# Altium PCB UZ_D_Voltage_3V3_5V.PcbDoc (part 1 of 2)
Units mm, origin at the board's own origin, x right, y up, seen from the top; angles counter-clockwise.
Board outline 155.98 x 100 mm, 2 copper layers (Top Layer, Bottom Layer), stack 0.68 mm thick; 108 components, 127 nets, 481 pads, 154 vias.
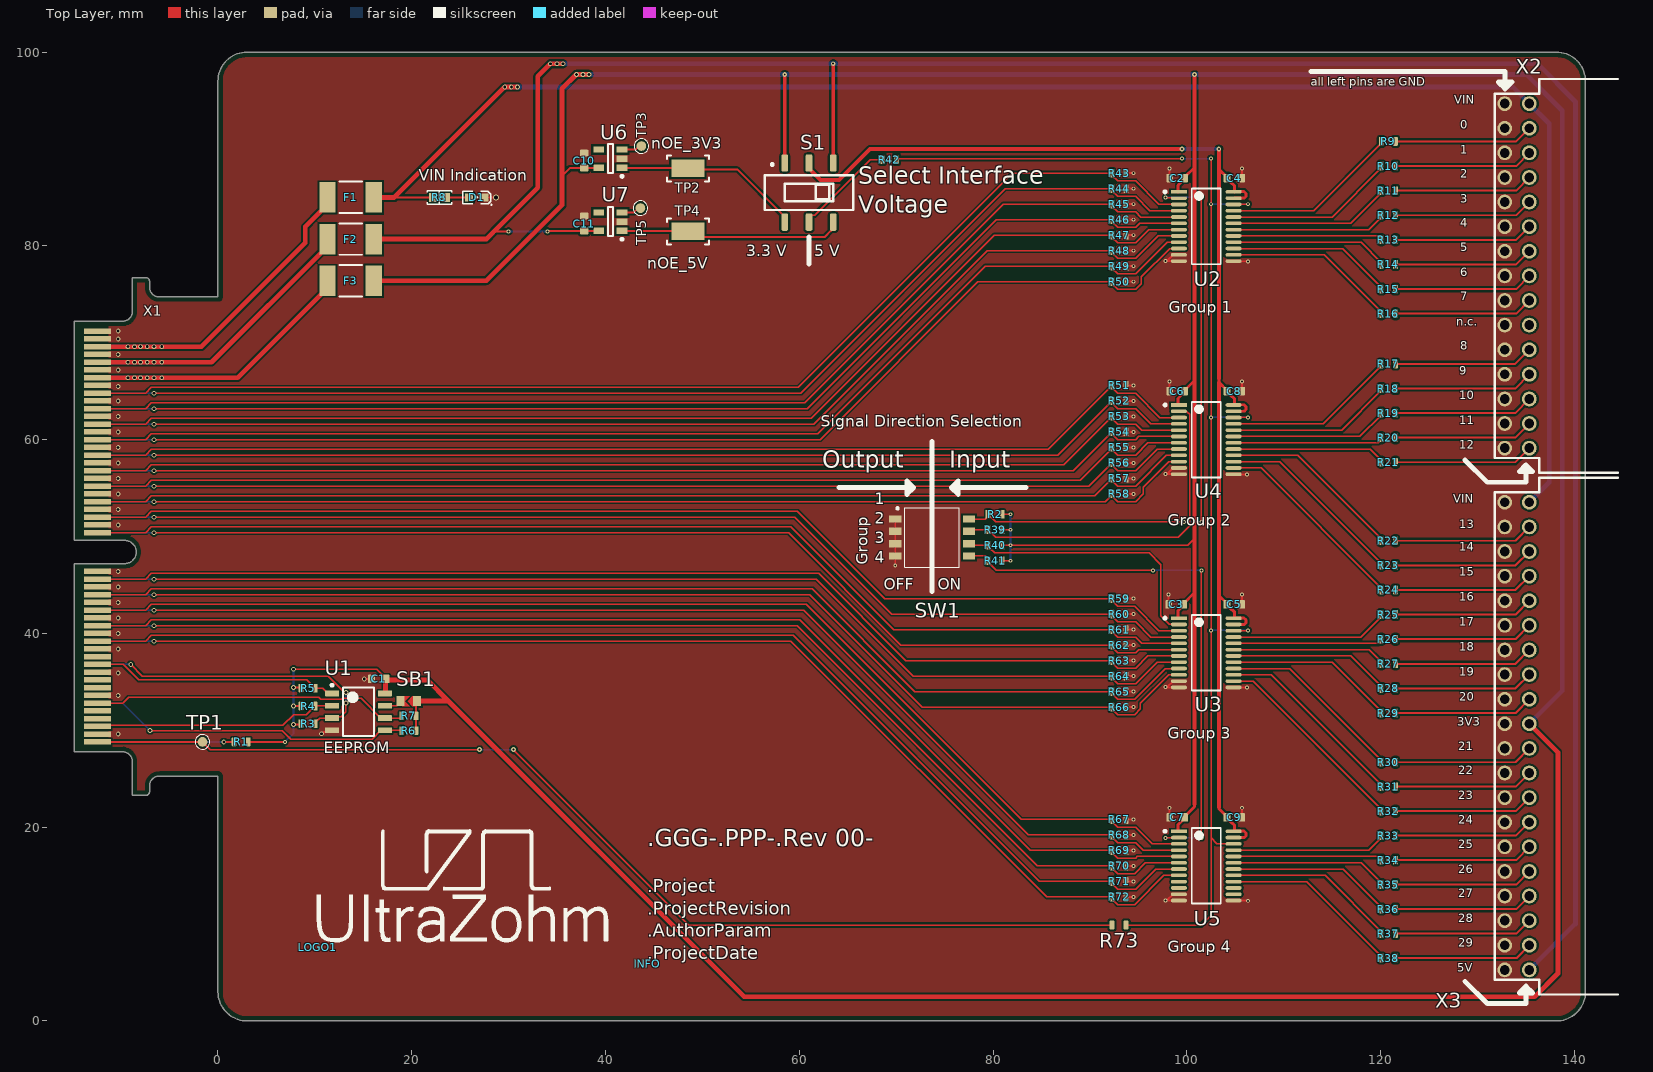
[diagram p0: Top Layer view]
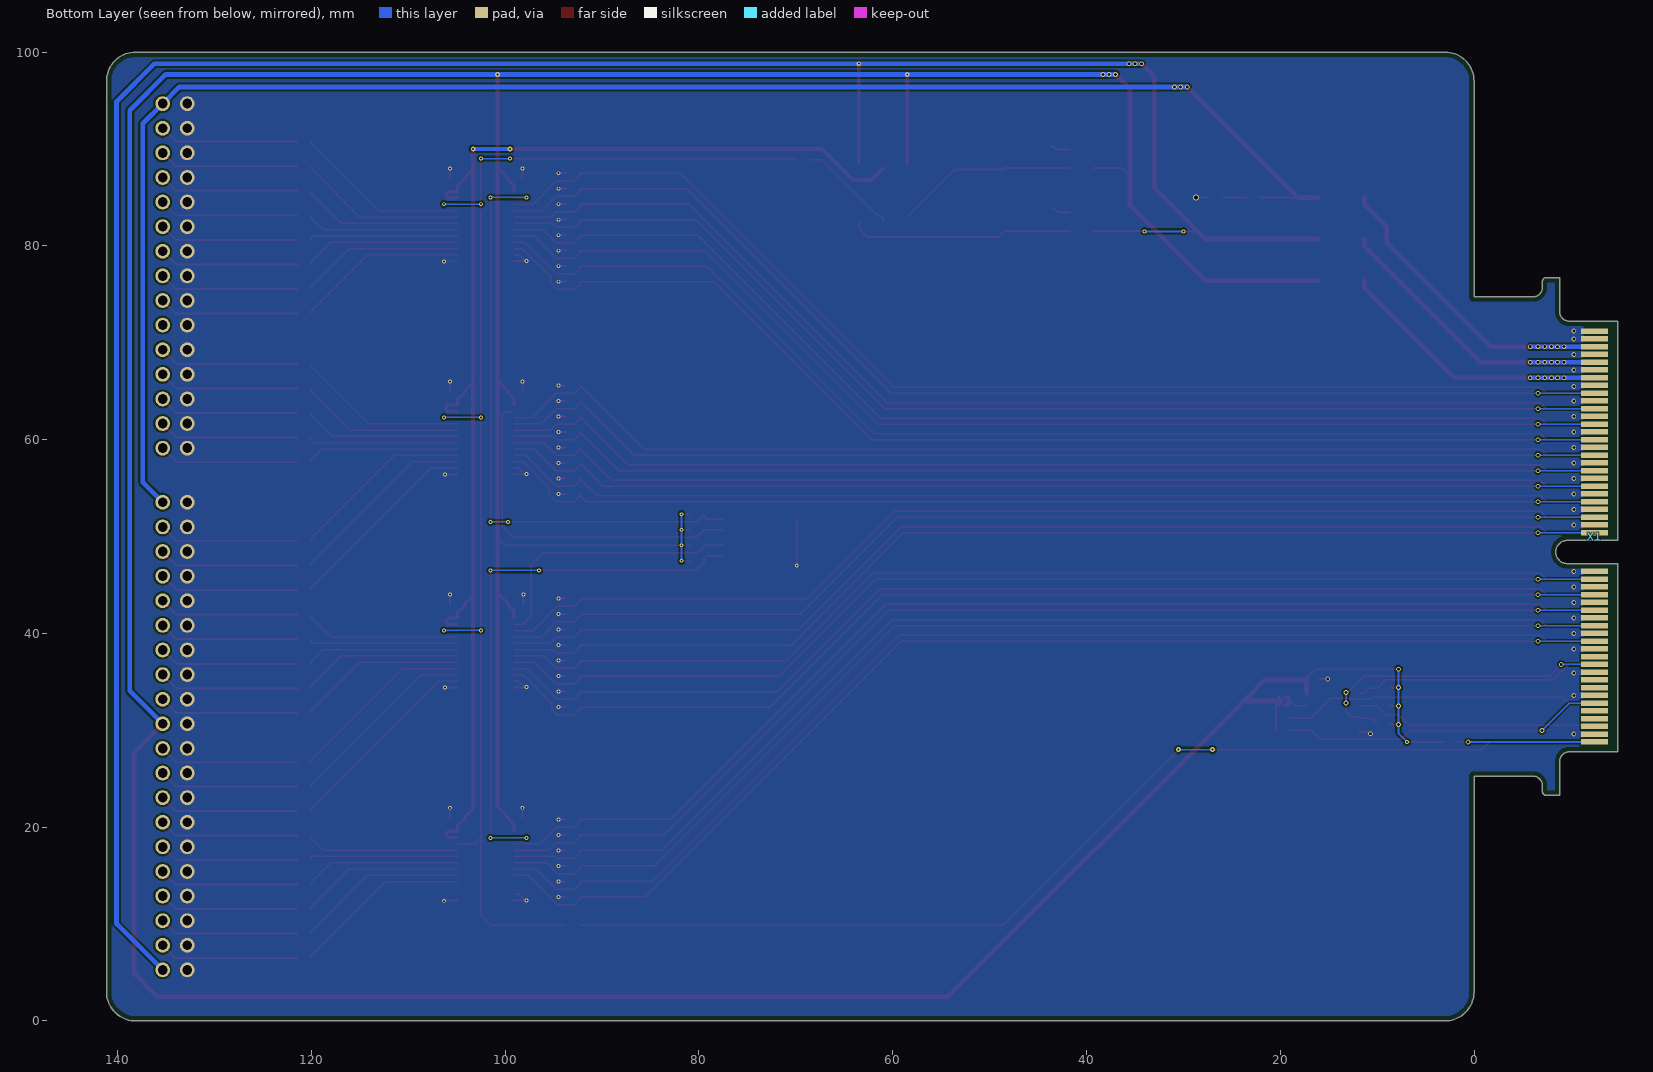
[diagram p1: Bottom Layer view, seen from below]
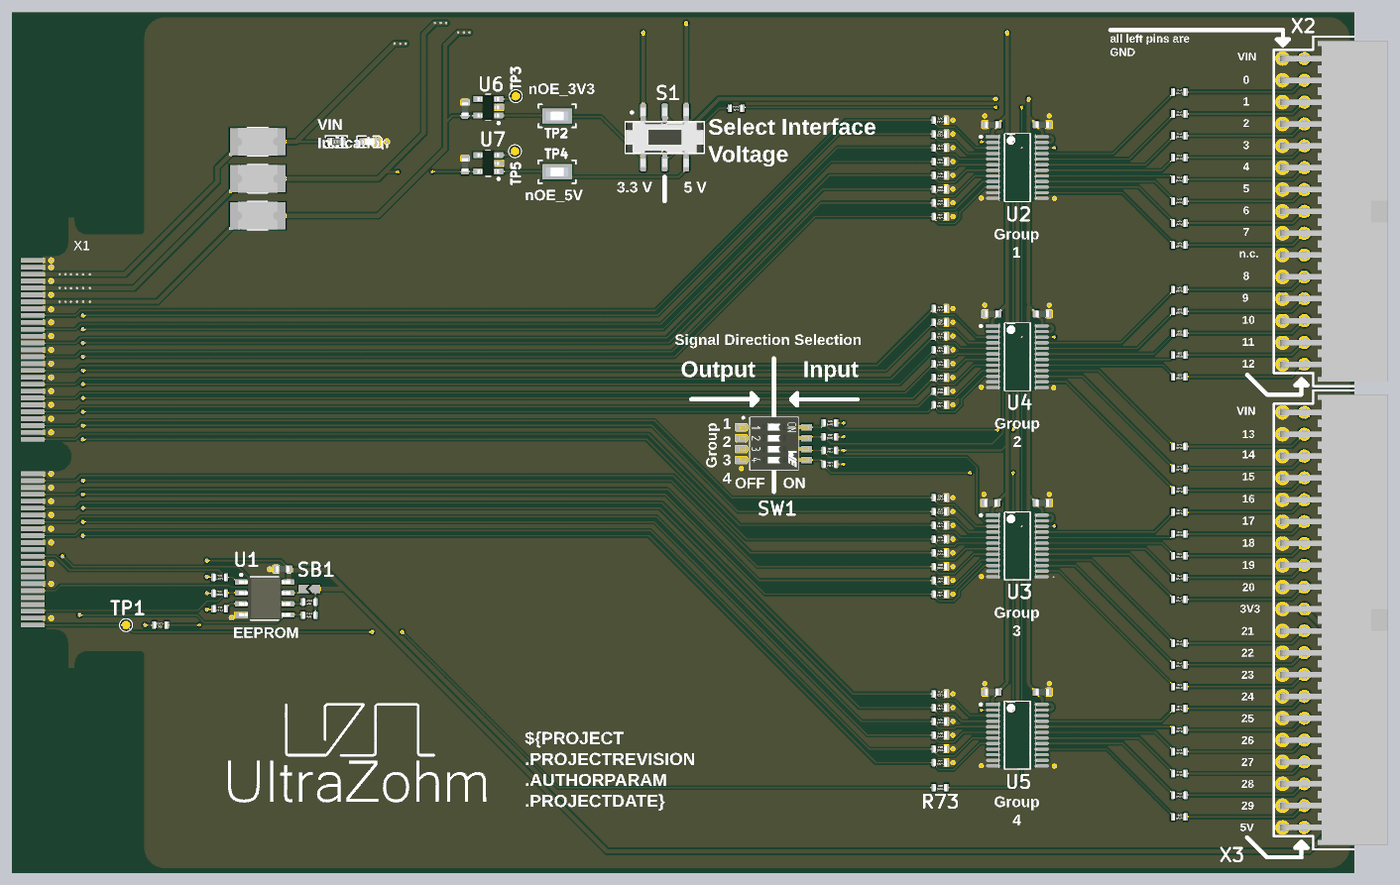
[diagram p3: 3D render of the assembled board from above, using the file's embedded part models]

## Layer stack, top to bottom
Top Solder: solder mask 0.01, Solder Resist, Dk 3.5
Top Layer: signal copper 0.035
Dielectric 2: prepreg 0.115, FR-4, Dk 4.4
Dielectric 1: core 0.38, Core-036, Dk 4.4
Dielectric 3: prepreg 0.115, FR-4, Dk 4.4
Bottom Layer: signal copper 0.035
Bottom Solder: solder mask 0.01, Solder Resist, Dk 3.5

## Board outline
-14.84,27.775 -9.84,27.775 cw(c-9.84,26.775) -8.84,26.775 -8.84,23.275 -7.46,23.275 ccw(c-7.46,23.675) -7.06,23.675 -7.06,24.275 cw(c-6.06,24.275) -6.06,25.275 0,25.275 0,3 ccw(c3,3) 3,0 138.141,0 ccw(c138.141,3) 141.141,3 141.141,97 ccw(c138.141,97) 138.141,100 3,100 ccw(c3,97) 0,97 0,74.725 -6.06,74.725 cw(c-6.06,75.725) -7.06,75.725 -7.06,76.325 ccw(c-7.46,76.325) -7.46,76.725 -8.84,76.725 -8.84,73.225 cw(c-9.84,73.225) -9.84,72.225 -14.84,72.225 -14.84,49.6 -9.64,49.6 cw(c-9.64,48.4) -9.64,47.2 -14.84,47.2

## Design rules (kind name [scope] priority, off if disabled: settings)
BoardOutlineClearance BoardOutlineClearance_TopOverlay [OnLayer('Top Overlay') or OnLayer('Bottom Overlay')] p1: gap=0 ignorepadtopadclearanceinfootprint=FALSE
BoardOutlineClearance [All] p2: gap=0.508 ignorepadtopadclearanceinfootprint=FALSE except(0: Arc-SplitContinuation Track-SplitContinuation SMDPad-SplitContinuation THPad-SplitContinuation Via-SplitContinuation Fill-SplitContinuation Poly-SplitContinuation Region-SplitContinuation Text-OutlineEdge Text-CavityEdge Text-CutoutEdge Text-SplitBarrior Text-SplitContinuation; 0.254: SMDPad-OutlineEdge SMDPad-CavityEdge SMDPad-CutoutEdge SMDPad-SplitBarrior)
Clearance [All] p1: gap=0.2 ignorepadtopadclearanceinfootprint=FALSE except(0: Arc-Text Track-Text SMDPad-Text THPad-Text Via-Text Fill-Text Poly-Text Region-Text Text-Text Text-Hole; 0.127: Arc-Arc Arc-Track Track-Track SMDPad-SMDPad; 0.5: THPad-THPad Via-Via)
ComponentClearance [All] p1: gap=0 collisioncheckmode=3 verticalgap=0 showdistances=FALSE
DiffPairsRouting [All] p1: maxlimit=0.127 minlimit=0.127 mostfreqgap=0.127 toplayer_minwidth=0.254 toplayer_maxwidth=0.254 toplayer_prefwidth=0.254 bottomlayer_minwidth=0.254 bottomlayer_maxwidth=0.254 bottomlayer_prefwidth=0.254 impedanceprofiledriven=TRUE impedanceprofileid={1E899714-F215-421E-BD83-15DB56C979E2} maxuncoupledlength=12.7
HoleSize [All] p1: absolutevalues=TRUE maxlimit=6.3 minlimit=0.2 maxpercent=80.000 minpercent=20.000
MatchedLengths [All] p1: tolerance=0.254 checknetsindiffpair=TRUE checkdiffpairvsdiffpair=FALSE checkxsignals=FALSE checkothers=FALSE
MinimumSolderMaskSliver [All] p1: minsoldermaskwidth=0.089
PlaneConnect [All] p1: pad.planeconnectstyle=Relief pad.reliefexpansion=0.508 pad.reliefentries=4 pad.reliefconductorwidth=0.254 pad.reliefairgap=0.254 via.planeconnectstyle=Direct via.reliefexpansion=0.508 via.reliefentries=4 via.reliefconductorwidth=0.254 via.reliefairgap=0.254
PolygonConnect PolygonConnect_GND [InNet('GND')] p1 off: thpad.connectstyle=Relief thpad.reliefconductorwidth=0.254 thpad.reliefentries=4 thpad.polygonreliefangle="90 Angle" thpad.airgapwidth=0.254 smdpad.connectstyle=Relief smdpad.reliefconductorwidth=0.254 smdpad.reliefentries=4 smdpad.polygonreliefangle="90 Angle" smdpad.airgapwidth=0.254 via.connectstyle=Direct via.reliefconductorwidth=0.254 via.reliefentries=4 via.polygonreliefangle="90 Angle" via.airgapwidth=0.254
PolygonConnect [All] p2: connectstyle=Direct reliefconductorwidth=0.254 reliefentries=4 polygonreliefangle="90 Angle" airgapwidth=0.127
RoomDefinition Component_LowerEdgeKeepOut [All] p1: confinementstyle=ConfineOut formatcopy=TRUE lockcomponents=FALSE outline 0,0 135.5,0 135.5,3 0,3
RoomDefinition Component_UpperEdgeKeepOut [All] p2: confinementstyle=ConfineOut formatcopy=TRUE lockcomponents=FALSE outline 0,97 135.5,97 135.5,100 0,100
RoutingVias [All] p1: holewidth=0.3 width=0.6 viastyle="Through Hole" minholewidth=0.2 minwidth=0.4 maxholewidth=0.8 maxwidth=1.6
SilkToSilkClearance [All] p1: silktosilkclearance=0
SilkToSolderMaskClearance [IsPad] p1: minsilkscreentomaskgap=0 clearancetoexposedcopper=TRUE
SolderMaskExpansion [All] p1: expansion=0.102 istentingtop=FALSE
Width width_s75 [InNetClass('S75')] p1 off: maxlimit=0.1 minlimit=0.1 preferedwidth=0.1 minimp=50.000000 maximp=50.000000 favimp=50.000000
Width [All] p2: maxlimit=10 minlimit=0.127 preferedwidth=0.254 minimp=50.000000 maximp=50.000000 favimp=50.000000
23 further rules are at their usual default settings.

## Classes and differential pairs
component class U_Output_Voltage_Selection_and_Enable: C10 C11 R42 R73 S1 TP2 TP3 TP4 TP5 U6 U7
component class U_Level_Shifter: C2 C3 C4 C5 C6 C7 C8 C9 R2 R39 R40 R41 R43 R44 R45 R46 R47 R48 R49 R50 R51 R52 R53 R54 R55 R56 R57 R58 R59 R60 R61 R62 R63 R64 R65 R66 R67 R68 R69 R70 R71 R72 SW1 U2 U3 U4 U5
component class U_Front_Connector: R9 R10 R11 R12 R13 R14 R15 R16 R17 R18 R19 R20 R21 R22 R23 R24 R25 R26 R27 R28 R29 R30 R31 R32 R33 R34 R35 R36 R37 R38 X2 X3
component class X1: C1 D1 F1 F2 F3 R1 R3 R4 R5 R6 R7 R8 SB1 TP1 U1 X1

## Components (designator, comment, footprint, x,y, rotation, side; value= is the part's Value field where it differs from the comment)
C1 "100 nF" C_0603_TE 16.6,35.297 r270 top
C2 "100 nF" C_0603_TE 99,87 r270 top
C3 "100 nF" C_0603_TE 98.9,43 r270 top
C4 "100 nF" C_0603_TE 104.9,87 r90 top
C5 "100 nF" C_0603_TE 104.9,43 r90 top
C6 "100 nF" C_0603_TE 99,65 r270 top
C7 "100 nF" C_0603_TE 99,21 r270 top
C8 "100 nF" C_0603_TE 104.9,65 r90 top
C9 "100 nF" C_0603_TE 104.9,21 r90 top
C10 "100 nF" C_0603_TE 37.8,88.8 r180 top
C11 "100 nF" C_0603_TE 37.8,82.3 r180 top
D1 "150060BS84000" WL-SMCW_0603 26.7,85 r180 top
F1 "Littelfuse_PTC_1812" 1812_PTC_Polyfuse_Littelfuse 13.7,85 r0 top value="PTC, 1.1 A, 24V"
F2 "Littelfuse_PTC_1812" 1812_PTC_Polyfuse_Littelfuse 13.7,80.7 r0 top value="PTC, 1.1 A, 24V"
F3 "Littelfuse_PTC_1812" 1812_PTC_Polyfuse_Littelfuse 13.7,76.4 r0 top value="PTC, 1.1 A, 24V"
INFO "Design Information" Design_info 44.3,5.9 r0 top
LOGO1 "UZ Logo" UZ_Logo_small 10.3,7.6 r0 top
R1 "1k" R_0603_TE 2.4,28.8 r270 top
R2 "10k" R_0603_TE 80.2,52.3 r90 top
R3 "4k7" R_0603_TE 9.3,30.688 r90 top
R4 "4k7" R_0603_TE 9.3,32.497 r90 top
R5 "4k7" R_0603_TE 9.3,34.347 r90 top
R6 "100k" R_0603_TE 19.7,29.958 r270 top
R7 "100k" R_0603_TE 19.7,31.488 r270 top
R8 "24k9" "RES 0603_1608" 22.85,85 r180 top
R9 "39R" R_0603_TE 120.8,90.78 r90 top
R10 "39R" R_0603_TE 120.8,88.24 r90 top
R11 "39R" R_0603_TE 120.8,85.7 r90 top
R12 "39R" R_0603_TE 120.8,83.16 r90 top
R13 "39R" R_0603_TE 120.8,80.62 r90 top
R14 "39R" R_0603_TE 120.8,78.08 r90 top
R15 "39R" R_0603_TE 120.8,75.54 r90 top
R16 "39R" R_0603_TE 120.8,73 r90 top
R17 "39R" R_0603_TE 120.8,67.813 r90 top
R18 "39R" R_0603_TE 120.8,65.275 r90 top
R19 "39R" R_0603_TE 120.8,62.737 r90 top
R20 "39R" R_0603_TE 120.8,60.2 r90 top
R21 "39R" R_0603_TE 120.8,57.662 r90 top
R22 "39R" R_0603_TE 120.8,49.563 r90 top
R23 "39R" R_0603_TE 120.8,47.023 r90 top
R24 "39R" R_0603_TE 120.8,44.483 r90 top
R25 "39R" R_0603_TE 120.8,41.943 r90 top
R26 "39R" R_0603_TE 120.8,39.403 r90 top
R27 "39R" R_0603_TE 120.8,36.863 r90 top
R28 "39R" R_0603_TE 120.8,34.323 r90 top
R29 "39R" R_0603_TE 120.8,31.783 r90 top
R30 "39R" R_0603_TE 120.8,26.703 r90 top
R31 "39R" R_0603_TE 120.8,24.177 r90 top
R32 "39R" R_0603_TE 120.8,21.652 r90 top
R33 "39R" R_0603_TE 120.8,19.126 r90 top
R34 "39R" R_0603_TE 120.8,16.6 r90 top
R35 "39R" R_0603_TE 120.8,14.074 r90 top
R36 "39R" R_0603_TE 120.8,11.548 r90 top
R37 "39R" R_0603_TE 120.8,9.022 r90 top
R38 "39R" R_0603_TE 120.8,6.497 r90 top
R39 "10k" R_0603_TE 80.2,50.7 r90 top
R40 "10k" R_0603_TE 80.2,49.1 r90 top
R41 "10k" R_0603_TE 80.2,47.5 r90 top
R42 "39R" R_0603_TE 69.3,88.9 r270 top
R43 "5k1" R_0603_TE 93,87.5 r90 top
R44 "5k1" R_0603_TE 93,85.9 r90 top
R45 "5k1" R_0603_TE 93,84.3 r90 top
R46 "5k1" R_0603_TE 93,82.7 r90 top
R47 "5k1" R_0603_TE 93,81.1 r90 top
R48 "5k1" R_0603_TE 93,79.5 r90 top
R49 "5k1" R_0603_TE 93,77.9 r90 top
R50 "5k1" R_0603_TE 93,76.3 r90 top
R51 "5k1" R_0603_TE 93,65.6 r90 top
R52 "5k1" R_0603_TE 93,64 r90 top
R53 "5k1" R_0603_TE 93,62.4 r90 top
R54 "5k1" R_0603_TE 93,60.8 r90 top
R55 "5k1" R_0603_TE 93,59.2 r90 top
R56 "5k1" R_0603_TE 93,57.6 r90 top
R57 "5k1" R_0603_TE 93,56 r90 top
R58 "5k1" R_0603_TE 93,54.4 r90 top
R59 "5k1" R_0603_TE 93,43.6 r90 top
R60 "5k1" R_0603_TE 93,42 r90 top
R61 "5k1" R_0603_TE 93,40.4 r90 top
R62 "5k1" R_0603_TE 93,38.8 r90 top
R63 "5k1" R_0603_TE 93,37.2 r90 top
R64 "5k1" R_0603_TE 93,35.6 r90 top
R65 "5k1" R_0603_TE 93,34 r90 top
R66 "5k1" R_0603_TE 93,32.4 r90 top
R67 "5k1" R_0603_TE 93,20.8 r90 top
R68 "5k1" R_0603_TE 93,19.2 r90 top
R69 "5k1" R_0603_TE 93,17.6 r90 top
R70 "5k1" R_0603_TE 93,16 r90 top
R71 "5k1" R_0603_TE 93,14.4 r90 top
R72 "5k1" R_0603_TE 93,12.8 r90 top
R73 "39R" R_0603_TE 93,9.9 r90 top
S1 "SS-3235S-L1" SS-3235S-L1 61,85.5 r0 top value=DPDT
SB1 "Solder Bump 0603" SB_0603 19.7,33.005 r0 top
SW1 "DSHP04TS-S" 416131160804 73.7,49.9 r270 top value=DIP-Switch
TP1 "Testpoint 1mm" TP_1mm -1.6,28.8 r0 top
TP2 "5015" FP-5015-MFG 48.5,88 r0 top value="SMD Testpoint"
TP3 "Testpoint 1mm" TP_1mm 43.7,90.3 r270 top
TP4 "5015" FP-5015-MFG 48.5,81.5 r0 top value="SMD Testpoint"
TP5 "Testpoint 1mm" TP_1mm 43.6,83.9 r270 top
U1 "M24C02-WMN6TP" D0008A_N 14.5,31.9 r0 top
U2 "SN74LXC8T245PWR" TSSOP-24 102,82 r0 top value="1.1 - 5.5 V"
U3 "SN74LXC8T245PWR" TSSOP-24 102,38 r0 top value="1.1 - 5.5 V"
U4 "SN74LXC8T245PWR" TSSOP-24 102,60 r0 top value="1.1 - 5.5 V"
U5 "SN74LXC8T245PWR" TSSOP-24 102,16 r0 top value="1.1 - 5.5 V"
U6 "TPS3825-33" SOT23-5_N 40.5,89 r180 top
U7 "TPS3825-50" SOT23-5_N 40.5,82.5 r180 top
X1 "HSEC8-150-01-XX-DV-A-BL-CARD" HSEC8-150-01-XX-DV-A-BL-CARD -14.84,50 r270 bottom locked
X2 "IPL1-115-01-L-D-RA-K" IPL1-115-01-XX-D-RA 145,76.9 r270 top locked
X3 "IPL1-120-01-L-D-RA-K" IPL1-120-01-XX-D-RA 145,29.4 r270 top locked

## Footprints (in the part's own frame and the unit in brackets; to place one, negate y for a bottom-side part, rotate by r counter-clockwise, add the part's x,y. Pads: shape width x height; smd on the part's side, far side on the other; paste and mask are expansions set on the pad)
1812_PTC_Polyfuse_Littelfuse [mm] "Chip Fuse, 2-Leads, Body 4.6x3.24mm"
  rect 1.68x3.14 smd: 1(-2.39,0) 2(2.39,0)
  silkscreen extent -1.15,-1.62 1.15,1.62, body extent -2.3,-1.62 2.3,1.62, height 1.15
416131160804 [mm] "04p, 1.27mm Pitch, Horizontal, HP Type, SMT, flat Actuator, black, with Tape, T&R"
  rect 0.76x1.27 smd: 1(-1.905,-3.81) 2(-0.635,-3.81) 3(0.635,-3.81) 4(1.905,-3.81) 5(1.905,3.81) 6(0.635,3.81) 7(-0.635,3.81) 8(-1.905,3.81)
  silkscreen extent -3.1,-3.66 3.06,2.8, body extent -3.06,-4 3.06,4, height 2.06
C_0603_TE [mm] "Vishay VJ0603 1.6 x 0.8 (+0.15/-0.1) 0.4 +/- 0,15mm Kontakte"
  rrect33% 0.88x0.71 smd: 1(0,0.77) 2(0,-0.77)
  body extent -0.4,-0.8 0.4,0.8, height 1
D0008A_N [mm] "SOIC, 8-Leads, Body 5x4mm, Pitch 1.27mm, IPC Medium Density"
  rrect17% 1.45x0.6 smd: 1(-2.725,1.905) 2(-2.725,0.635) 3(-2.725,-0.635) 4(-2.725,-1.905) 5(2.725,-1.905) 6(2.725,-0.635) 7(2.725,0.635) 8(2.725,1.905)
  silkscreen extent -2.85,-2.5 1.6,2.88, body extent -3,-2.45 3,2.45, height 1.63
Design_info [mm] "Design information about the PCB"
FP-5015-MFG [mm]
  rect 3.43x1.78 smd paste+0 mask+0: 1(0,0)
  silkscreen extent -2.16,-1.34 2.17,1.34, body extent -1.33,-0.51 1.33,0.51, height 1.52
HSEC8-150-01-XX-DV-A-BL-CARD [mm]
  rect 0.55x2.8 smd far side mask+0.05: 1(-21.2,-2.4) 3(-20.4,-2.4) 5(-19.6,-2.4) 7(-18.8,-2.4) 9(-18,-2.4) 11(-17.2,-2.4) 13(-16.4,-2.4) 15(-15.6,-2.4) 17(-14.8,-2.4) 19(-14,-2.4) 21(-13.2,-2.4) 23(-12.4,-2.4) 25(-11.6,-2.4) 27(-10.8,-2.4) 29(-10,-2.4) 31(-9.2,-2.4) 33(-8.4,-2.4) 35(-7.6,-2.4) 37(-6.8,-2.4) 39(-6,-2.4) 41(-5.2,-2.4) 43(-4.4,-2.4) 45(-3.6,-2.4) 47(-2.8,-2.4) 49(-2,-2.4) 51(-1.2,-2.4) 53(-0.4,-2.4) 55(3.6,-2.4) 57(4.4,-2.4) 59(5.2,-2.4) 61(6,-2.4) 63(6.8,-2.4) 65(7.6,-2.4) 67(8.4,-2.4) 69(9.2,-2.4) 71(10,-2.4) 73(10.8,-2.4) 75(11.6,-2.4) 77(12.4,-2.4) 79(13.2,-2.4) 81(14,-2.4) 83(14.8,-2.4) 85(15.6,-2.4) 87(16.4,-2.4) 89(17.2,-2.4) 91(18,-2.4) 93(18.8,-2.4) 95(19.6,-2.4) 97(20.4,-2.4) 99(21.2,-2.4)
  rect 0.55x2.8 smd mask+0.05: 2(-21.2,-2.4) 4(-20.4,-2.4) 6(-19.6,-2.4) 8(-18.8,-2.4) 10(-18,-2.4) 12(-17.2,-2.4) 14(-16.4,-2.4) 16(-15.6,-2.4) 18(-14.8,-2.4) 20(-14,-2.4) 22(-13.2,-2.4) 24(-12.4,-2.4) 26(-11.6,-2.4) 28(-10.8,-2.4) 30(-10,-2.4) 32(-9.2,-2.4) 34(-8.4,-2.4) 36(-7.6,-2.4) 38(-6.8,-2.4) 40(-6,-2.4) 42(-5.2,-2.4) 44(-4.4,-2.4) 46(-3.6,-2.4) 48(-2.8,-2.4) 50(-2,-2.4) 52(-1.2,-2.4) 54(-0.4,-2.4) 56(3.6,-2.4) 58(4.4,-2.4) 60(5.2,-2.4) 62(6,-2.4) 64(6.8,-2.4) 66(7.6,-2.4) 68(8.4,-2.4) 70(9.2,-2.4) 72(10,-2.4) 74(10.8,-2.4) 76(11.6,-2.4) 78(12.4,-2.4) 80(13.2,-2.4) 82(14,-2.4) 84(14.8,-2.4) 86(15.6,-2.4) 88(16.4,-2.4) 90(17.2,-2.4) 92(18,-2.4) 94(18.8,-2.4) 96(19.6,-2.4) 98(20.4,-2.4) 100(21.2,-2.4)
IPL1-115-01-XX-D-RA [mil]
  round 60 hole 40 mask+3: 1(-700,-380) 2(-600,-380) 3(-500,-380) 4(-400,-380) 5(-300,-380) 6(-200,-380) 7(-100,-380) 8(0,-380) 9(100,-380) 10(200,-380) 11(300,-380) 12(400,-380) 13(500,-380) 14(600,-380) 15(700,-380) 16(-700,-480) 17(-600,-480) 18(-500,-480) 19(-400,-480) 20(-300,-480) 21(-200,-480) 22(-100,-480) 23(0,-480) 24(100,-480) 25(200,-480) 26(300,-480) 27(400,-480) 28(500,-480) 29(600,-480) 30(700,-480)
  silkscreen extent -800,-520 800,-20, body extent -780,-492 780,0, height 315
IPL1-120-01-XX-D-RA [mil]
  round 60 hole 40 mask+3: 1(-950,-380) 2(-850,-380) 3(-750,-380) 4(-650,-380) 5(-550,-380) 6(-450,-380) 7(-350,-380) 8(-250,-380) 9(-150,-380) 10(-50,-380) 11(50,-380) 12(150,-380) 13(250,-380) 14(350,-380) 15(450,-380) 16(550,-380) 17(650,-380) 18(750,-380) 19(850,-380) 20(950,-380) 21(-950,-480) 22(-850,-480) 23(-750,-480) 24(-650,-480) 25(-550,-480) 26(-450,-480) 27(-350,-480) 28(-250,-480) 29(-150,-480) 30(-50,-480) 31(50,-480) 32(150,-480) 33(250,-480) 34(350,-480) 35(450,-480) 36(550,-480) 37(650,-480) 38(750,-480) 39(850,-480) 40(950,-480)
  silkscreen extent -1050,-520 1050,-20, body extent -1030,-492 1030,0, height 315
R_0603_TE [mm] "Vishay D0603 1.55 x 0.85 (+0.1/-0.05) 0.3 +/- 0,2mm Kontakte"
  rrect33% 0.9x0.5 smd: 1(0,0.73) 2(0,-0.73)
  body extent -0.42,-0.78 0.43,0.77, height 0.45
"RES 0603_1608" [mm] "Chip Resistor, 2-Leads, Body 1.60x0.80mm, IPC Medium Density"
  rect 0.85x0.95 smd: 1(-0.65,0) 2(0.65,0)
  silkscreen extent -1.27,-0.7 1.27,0.7, body extent -0.8,-0.4 0.8,0.4, height 0.45
SB_0603 [mil] "Solder Bump"
  rect 32x40 smd: 1(33.75,0) 2(-33.75,0)
  Top Layer region: 23.75,20 14.75,20 -5.25,0 14.75,-20 23.75,-20
  Top Layer region: -26.25,0 -17.25,0 2.75,20 -26.25,20
  Top Layer region: -26.25,0 -17.25,0 2.75,-20 -26.25,-20
SOT23-5_N [mm] "SOT23, 5-Leads, Body 2.9x1.6mm, Pitch 0.95mm, Lead Span 2.8mm, IPC Medium Density"
  rect 1.1x0.65 smd: 1(-1.2,0.95) 2(-1.2,0) 3(-1.2,-0.95) 4(1.2,-0.95) 5(1.2,0.95)
  silkscreen extent -1.33,-1.5 0.25,1.95, body extent -1.25,-1.5 1.25,1.5, height 1.06
SS-3235S-L1 [mm]
  rrect50% 0.7x1.8 smd: 1(-2.5,3.05) 2(0,3.05) 3(2.5,3.05) 4(-2.5,-3.05) 5(0,-3.05) 6(2.5,-3.05)
  silkscreen extent -4.55,-1.8 4.55,3.02, body extent -4.55,-3.45 4.55,3.45, height 5.5
TP_1mm [mm]
  round 1 smd paste-1: 1(0,0)
  silkscreen extent -0.75,-0.75 0.75,0.75
TSSOP-24 [mm]
  rect 1.655x0.381 smd paste+0 mask+0: 1(-2.825,3.575)
  rrect100% 1.655x0.381 smd paste+0 mask+0: 2(-2.825,2.925) 3(-2.825,2.275) 4(-2.825,1.625) 5(-2.825,0.975) 6(-2.825,0.325) 7(-2.825,-0.325) 8(-2.825,-0.975) 9(-2.825,-1.625) 10(-2.825,-2.275) 11(-2.825,-2.925) 12(-2.825,-3.575) 13(2.825,-3.575) 14(2.825,-2.925) 15(2.825,-2.275) 16(2.825,-1.625) 17(2.825,-0.975) 18(2.825,-0.325) 19(2.825,0.325) 20(2.825,0.975) 21(2.825,1.625) 22(2.825,2.275) 23(2.825,2.925) 24(2.825,3.575)
  silkscreen extent -4.38,-3.9 1.5,3.9, body extent -3.9,-4.15 3.9,4.15, height 0.25
UZ_Logo_small [mm] "logo width 3cm"
  silkscreen extent -0.05,0.57 29.94,12.12
WL-SMCW_0603 [mm] "SMD Mono-color Chip LED, body 1.6x0.8mm"
  rect 0.8x0.8 smd: 1(-0.8,0) 2(0.8,0)
  silkscreen extent -1.59,-0.65 1.45,0.83, body extent -0.8,-0.4 0.8,0.4, height 0.7

## Part data
C1 C2 C3 C4 C5 C6 C7 C8 C9 C10 C11: library part UZgen_C_0603_100nF_50V_X7R, "Generic capacitor", Device Package=0603, Manufacturer=UZgen, Tolerance="10 %", Voltage=50V, Created from=AGeiger, Created On="02.07.2024 14:42:23", Last Updated="08.08.2024 15:01:15", Manufacturer Part Number=UZgen_C_0603_100nF_50V_X7R, Mounting Type=SMD, PartID=1, Technology=X7R
D1: "WL-SMCW SMD Mono-color Chip LED Waterclear Blue", Color=blue, Device Package=0603, Forward Current I_f="20 mA", Forward Voltage U_f="3.2 V", Manufacturer="Wuerth Elektronik", Nominal Power="78 mW", Operating Temperature="-40 - 85 °C", Supplier Part Number 1=710-150060BS84000, Component Type="LED Diode", ComponentLink1Description=Datasheet, ComponentLink1URL=https://www.mouser.de/datasheet/2/445/150060BS84000-1838909.pdf, Created from=MGremer, Created On="08.12.2020 10:19:38", Last Updated="03.03.2021 09:59:51", Light Intensity="560 mcd", Live Cycle Status=1, Manufacturer Part Number=150060BS84000, Mounting Type=SMD, PartID=1, Stock number="not stored", Supplier 1=Mouser, Supplier 2=Farnell, Supplier 3=Digi-Key, Supplier Part Number 2=3408611, Supplier Part Number 3=732-150060BS84000CT-ND, Type=Standard, Wavelength="470 nm"
F1 F2 F3: "POLYSWITCH RESETTABLE DEVICES", Hold Current=1.1A, LCSC Part Number=C70119, Manufacturer=Littelfuse, MPN=miniASMDC110F/24, Nominal current="1 A", Operating Temperature="-40 - 85 °C", Package=1812, Resistance="0.18 Ohm", Supplier Part Number 1=530-0ZCG0150BF2C, Trip Current=2.2A, Voltage=24V, Component Type=Littelfuse_PTC_1812, ComponentLink1Description=Datasheet, ComponentLink1URL=https://www.littelfuse.com/~/media/electronics/datasheets/resettable_ptcs/littelfuse_ptc_surface_mount_catalog_datasheet.pdf.pdf, Created=2019_02_10_AGeiger, Created from=MHlatky, Created On="07.05.2021 06:50:33", Last Updated="27.05.2022 15:06:17", Live Cycle Status=1, Manufacturer Part Number=Littelfuse_PTC_1812, MF=Littelfuse, Mounting Type=SMD, PartID=5, Supplier 1=Mouser, Type=Fuse
INFO: library part Design_info
LOGO1: library part 1, "Official Project Logo of the UltraZohm", Manufacturer="PCB Manufacturer", Manufacturer Part Number="UltraZohm Logo", Component Type=Logo, ComponentLink1Description=Homepage, ComponentLink1URL=https://ultrazohm.com, Created from="T. Wendt", Created On="19.02.2021 16:55:56", Last Updated="02.03.2021 14:31:24", Live Cycle Status=1, PartID=1, Type="Standard (No BOM)"
R1: library part UZgen_R_0603_1k, "Generic resistor", Device Package=0603, Manufacturer=UZgen, Tolerance="1 %", Created from=UZgenTool, Created On="02.07.2024 17:29:49", Last Updated="02.07.2024 17:29:49", Manufacturer Part Number=UZgen_R_0603_1k, Mounting Type=SMD, PartID=221
R2 R39 R40 R41: library part UZgen_R_0603_10k, "Generic resistor", Device Package=0603, Manufacturer=UZgen, Tolerance="1 %", Created from=AGeiger, Created On="02.07.2024 14:34:53", Last Updated="02.07.2024 14:37:16", Manufacturer Part Number=UZgen_R_0603_10k, Mounting Type=SMD, PartID=1
R3 R4 R5: library part UZgen_R_0603_4k7, "Generic resistor", Device Package=0603, Manufacturer=UZgen, Tolerance="1 %", Created from=UZgenTool, Created On="02.07.2024 17:29:50", Last Updated="02.07.2024 17:29:50", Manufacturer Part Number=UZgen_R_0603_4k7, Mounting Type=SMD, PartID=237
R6 R7: library part UZgen_R_0603_100k, "Generic resistor", Device Package=0603, Manufacturer=UZgen, Tolerance="1 %", Created from=UZgenTool, Created On="02.07.2024 17:29:50", Last Updated="02.07.2024 17:29:50", Manufacturer Part Number=UZgen_R_0603_100k, Mounting Type=SMD, PartID=268
R8: library part CRCW060324K9FKEA, "SMD resistor 1%", Device Package=0603, Manufacturer=Vishay, Supplier Part Number 1=71-CRCW0603-24.9K-E3, Tolerance=1%, Component Type="SMD resistor", ComponentLink1Description=Datasheet, ComponentLink1URL=https://www.mouser.de/datasheet/2/427/dcrcwe3-1762152.pdf, Created from=MGremer, Created On="14.12.2020 16:17:14", Last Updated="02.03.2021 14:07:32", Live Cycle Status=1, Manufacturer Part Number=CRCW060324K9FKEA, Mounting Type=SMD, PartID=157, Stock number="not stored", Supplier 1=Mouser, Type=Resistor
R9 R10 R11 R12 R13 R14 R15 R16 R17 R18 R19 R20 R21 R22 R23 R24 R25 R26 R27 R28 R29 R30 R31 R32 R33 R34 R35 R36 R37 R38 R42 R73: library part UZgen_R_0603_39R, "Generic resistor", Device Package=0603, Manufacturer=UZgen, Tolerance="1 %", Created from=UZgenTool, Created On="02.07.2024 17:29:48", Last Updated="02.07.2024 17:29:48", Manufacturer Part Number=UZgen_R_0603_39R, Mounting Type=SMD, PartID=187
R43 R44 R45 R46 R47 R48 R49 R50 R51 R52 R53 R54 R55 R56 R57 R58 R59 R60 R61 R62 R63 R64 R65 R66 R67 R68 R69 R70 R71 R72: library part UZgen_R_0603_5k1, "Generic resistor", Device Package=0603, Manufacturer=UZgen, Tolerance="1 %", Created from=UZgenTool, Created On="02.07.2024 17:29:50", Last Updated="02.07.2024 17:29:50", Manufacturer Part Number=UZgen_R_0603_5k1, Mounting Type=SMD, PartID=238
S1: "50mA Horizontal attachment DPDT 12V 12V 50mA 10,000 times Black SMD Slide Switches ROHS", Device Package=SMD, LCSC Part Number=C500055, Manufacturer="XKB Connection", Operating Temperature="-40 to +85 °C", Component Type="Switch DPDT", ComponentLink1Description=Datasheet, ComponentLink1URL=https://www.lcsc.com/datasheet/lcsc_datasheet_2110111230_XKB-Connection-SS-3235S-L1_C500055.pdf, Created from=AGeiger, Created On="21.02.2024 17:10:55", Last Updated="23.08.2024 11:42:29", Live Cycle Status=1, Manufacturer Part Number=SS-3235S-L1, Mounting Type=SMD, PartID=49, Supplier 1=LCSC, Supplier Part Number 1=C500055, Type=Switch
SB1: library part =Value, Device Package=0603, Component Type="Solder Bump", Created from=AGeiger, Created On="09.01.2024 17:13:56", Last Updated="09.01.2024 17:13:56", Manufacturer Part Number="Solder Bump 0603", Mounting Type=SMD, PartID=1, Revision="July-2002: Re-released for DXP Platform."
SW1: "04p, 1.27mm Pitch, Horizontal, HP Type, SMT, flat Actuator, black, with Tape, T&R", Device Package=DIP, LCSC Part Number=C319050, Manufacturer="XKB Connectivity", Component Type=DIP-Switch, ComponentLink1Description=Datasheet, ComponentLink1URL=https://www.lcsc.com/datasheet/lcsc_datasheet_2110151630_XKB-Connection-DSHP04TS-S_C319050.pdf, Created from="T. Wendt", Created On="02.03.2021 14:59:37", Last Updated="20.12.2024 15:31:19", Live Cycle Status=1, Manufacturer Part Number=DSHP04TS-S, Minimum Order=1, Mounting Type=SMD, PartID=6, Stock number="not stored", Supplier 1=LCSC, Supplier Part Number 1=C319050, Type=DIP-Switch
TP1 TP3 TP5: library part NULL, Component Type=Testpoint, Created=2018_06_25_AGeiger, Created from=AGeiger, Created On="20.09.2022 13:14:57", Last Updated="20.09.2022 13:15:39", Live Cycle Status=1, Manufacturer=NULL, Manufacturer Part Number=NULL, PartID=9, Supplier 1=NULL, Supplier Part Number 1=NULL, Type=Testpoint
TP2 TP4: "Circuit Board Hardware - PCB SM TEST POINT ON T&R - MINIATURE", Device Package=SMD, LCSC Part Number=C5199798, Manufacturer="Keystone Electronics", Supplier Part Number 1=534-5015, Component Type="Circuit Board Hardware", ComponentLink1Description=Datasheet, ComponentLink1URL=https://www.mouser.de/datasheet/2/215/015-744075.pdf, ComponentLink2Description=Datasheet, ComponentLink2URL=http://www.keyelco.com/product-pdf.cfm?p=1357, Created from=AGeiger, Created On="03.06.2023 11:19:55", Last Updated="03.06.2023 11:43:17", Live Cycle Status=1, Manufacturer Part Number=5015, Mounting Type=SMD, PartID=26, Supplier 1=Mouser, Type="PCB SMD Testpoint"
U1: "2Kbit I2C SOP-8 EEPROM ROHS", Device Package=SOIC-8, LCSC Part Number=C7562, Manufacturer=STMicroelectronics, Operating Temperature="-40 to +85 °C", Supplier Part Number 1=511-M24C02-WMN6TP, Component Type=EEPROM, ComponentLink1Description=Datasheet, ComponentLink1URL=https://www.st.com/resource/en/datasheet/m24c01-w.pdf, Created from=AGeiger, Created On="19.11.2023 14:54:27", Last Updated="19.11.2023 21:39:04", Manufacturer Part Number=M24C02-WMN6TP, Mounting Type=SMD, PartID=1, Series=M24xxx, Supplier 1=Mouser, Supplier 2=LCSC, Supplier Part Number 2=C7562, Type=Memory
U2 U3 U4 U5: "8-bit Dual-Supply Bus Transceiver with Configurable Level Shifting and 3-State Outputs", Device Package=TSSOP-24, LCSC Part Number=C4363995, Manufacturer="Texas Instruments", Operating Temperature="–40 to +125 °C", Supplier Part Number 1=595-SN74LXC8T245PWR, Component Type="Level Shifter", ComponentLink1Description=Datasheet, ComponentLink1URL=https://www.ti.com/lit/ds/symlink/sn74lxc8t245.pdf, ComponentLink2Description=Datasheet, ComponentLink2URL=http://www.ti.com/lit/ds/symlink/sn74lvc8t245.pdf, Created from=AGeiger, Created On="13.12.2024 11:01:59", Last Updated="20.12.2024 10:32:15", Live Cycle Status=1, Manufacturer Part Number=SN74LXC8T245PWR, Mounting Type=SMD, PartID=12, Series=SN74LXC8T245, Stock number="not stored", Supplier 1=Mouser, Supplier 2=LCSC, Supplier Part Number 2=C4363995, Type="Level Shifter"
U6: library part TPS3825-33DBVT, "Supervisory Circuits 2.93V Monitor", Device Package=SOT-23-5, LCSC Part Number=C131921, Manufacturer="Texas Instruments", Operating Temperature="-40 to +85 °C", Supplier Part Number 1=595-TPS3825-33DBVT, Component Type="Voltage Monitor", ComponentLink1Description=Datasheet, ComponentLink1URL=https://www.ti.com/lit/ds/symlink/tps3825.pdf?ts=1734339739076&ref_url=https%253A%252F%252Fwww.ti.com%252Fproduct%252Fde-de%252FTPS3825, Created from=AGeiger, Created On="16.12.2024 15:31:49", Last Updated="16.12.2024 15:31:49", Live Cycle Status=1, Manufacturer Part Number=TPS3825-33DBVT, Mounting Type=SMD, PartID=46, Supplier 1=Mouser, Supplier 2=LCSC, Supplier Part Number 2=C131921, Type="Voltage Monitor"
U7: library part TPS3825-50DBVT, "Supervisory Circuits 4.55V Monitor", Device Package=SOT-23-5, LCSC Part Number=C702195, Manufacturer="Texas Instruments", Operating Temperature="-40 to +85 °C", Supplier Part Number 1=595-TPS3825-50DBVT, Component Type="Voltage Monitor", ComponentLink1Description=Datasheet, ComponentLink1URL=https://www.ti.com/lit/ds/symlink/tps3825.pdf?ts=1734339739076&ref_url=https%253A%252F%252Fwww.ti.com%252Fproduct%252Fde-de%252FTPS3825, Created from=AGeiger, Created On="16.12.2024 15:31:49", Last Updated="16.12.2024 15:31:49", Live Cycle Status=1, Manufacturer Part Number=TPS3825-50DBVT, Mounting Type=SMD, PartID=47, Supplier 1=Mouser, Supplier 2=LCSC, Supplier Part Number 2=C702195, Type="Voltage Monitor"
X1: "Mating Card Layout for HSEC8-150-01-XX-DV-A-BL", Manufacturer=SAMTEC, Created=2018_04_23_AGeiger
X2: "Terminal Assembly, Double Row, Right Angle, Thru-Hole, 2.54 mm x 2.54 mm Pitch, 30 Pins", Device Package=Connector, Manufacturer=SAMTEC, Component Type="Samtec Connector", ComponentLink1Description=Homepage, ComponentLink1URL=https://www.samtec.com/products/ipl1, Created from=TWendt, Created On="12.02.2021 15:31:18", Last Updated="15.02.2021 10:07:42", Live Cycle Status=1, Manufacturer Part Number=IPL1-115-01-L-D-RA-K, Number of positions=30, Number of rows=2, PartID=34, Stock number="not stored", Supplier 1=SAMTEC, Supplier Part Number 1=IPL1-115-01-L-D-RA-K, Type=Connector
X3: "Terminal Assembly, Double Row, Right Angle, Thru-Hole, 2.54 mm x 2.54 mm Pitch, 40 Pins", Device Package=Connector, Manufacturer=SAMTEC, Component Type="Samtec Connector", ComponentLink1Description=Homepage, ComponentLink1URL=https://www.samtec.com/products/ipl1, Created from=TWendt, Created On="12.02.2021 15:26:11", Last Updated="15.02.2021 10:07:42", Live Cycle Status=1, Manufacturer Part Number=IPL1-120-01-L-D-RA-K, Mounting Type=THT, Number of positions=40, Number of rows=2, PartID=33, Stock number="not stored", Supplier 1=SAMTEC, Supplier Part Number 1=IPL1-120-01-L-D-RA-K, Type=Connector

## Via types
v1: diameter 0.4, hole 0.2, Top Layer to Bottom Layer, 66 vias
v2: diameter 0.5, hole 0.3, Top Layer to Bottom Layer, 49 vias
v3: diameter 0.5, hole 0.3, Top Layer to Bottom Layer, tented both sides, 27 vias
v4: diameter 0.5, hole 0.2, Top Layer to Bottom Layer, 7 vias
v5: diameter 0.4, hole 0.2, Top Layer to Bottom Layer, tented top, 3 vias
v6: diameter 0.4, hole 0.2, Top Layer to Bottom Layer, tented both sides, 1 vias
v7: diameter 0.6, hole 0.4, Top Layer to Bottom Layer, 1 vias

## Nets (pads, with @x,y where several pads share a name; then routed paths per layer and width w, separated by ;. In a path a pad name is that pad's centre, name@x,y a point inside that pad or via, vN(x,y) a via of type N, cw(c..) or ccw(c..) an arc to the next point about the centre after c; other vN are vias at no path point)
3V3: C1.1 C2.1 C3.1 C6.1 C7.1 C10.1 F3.2 R1.1 R2.2 R3.1 R4.1 R5.1 R6.1 R7.1 R39.2 R40.2 R41.2 S1.1 SB1.1 U1.8 U2.1 U3.1 U4.1 U5.1 U6.5 X3.10 | length 530.4
  Top Layer w0.2: R1.1@3.13,28.8 v1(6.9,28.8) ; v2(7.8,30.6) 8.562,30.6 R3.1@8.65,30.688 ; v2(7.8,32.5) 8.647,32.5 R4.1@8.65,32.497 ; v2(7.8,34.4) 8.597,34.4 R5.1@8.65,34.347 ; v2(7.8,36.3) 16.397,36.3 17.397,35.3 C1.1@17.397,35.2 ; R6.1@20.43,29.958 20.43,31.488 20.43,32.878 SB1.1@20.557,33.005 ; 35.5,87.2 36.33,88.03 C10.1@37.8,88.03 39.28,88.03 U6.5@39.3,88.05 ; R41.2@80.93,47.5 v1(81.8,47.5) ; R40.2@80.93,49.1 v1(81.8,49.1) 100.1,49.1 100.8,49.8 ; R39.2@80.93,50.7 v1(81.8,50.7) ; R2.2@80.93,52.3 v1(81.8,52.3)
  Top Layer w0.3: U5.1@99.1,19.575 99.1,20.25 99.56,20.71 99.565,20.71 99.77,20.915 C7.1@99.77,21 99.77,21.085 100.8,22.115 100.8,22.4 ; U3.1@99.1,41.575 99.1,42.345 99.67,42.915 C3.1@99.67,43 99.67,43.085 100.8,44.215 ; U4.1@99.1,63.575 99.1,64.25 99.56,64.71 99.565,64.71 99.77,64.915 C6.1@99.77,65 99.77,65.085 100.785,66.1 100.8,66.1 ; U2.1@99.1,85.575 99.1,86.25 99.56,86.71 99.565,86.71 99.77,86.915 C2.1@99.77,87 99.77,87.085 100.785,88.1 100.8,88.1
  Top Layer w0.4: S1.1@58.5,88.55 v4(58.5,97.7) ; 100.8,22.4 100.8,44.215 100.8,49.8 100.8,66.1 100.8,88.1 v4(100.8,97.7)
  Top Layer w0.5: F3.2@16.09,76.4 27.7,76.4 35.5,84.2 35.5,87.2 35.5,96.2 v3(37,97.7) v3(38.3,97.7) ; U1.8@17.225,33.805 17.25,33.805 17.3,33.855 17.3,35.297 17.397,35.2 21.6,35.2 23.795,33.005 ; SB1.1@20.557,33.005 23.795,33.005 ; X3.10@135.348,30.67 138.3,27.718 138.3,4.9 135.9,2.5 54.3,2.5 23.795,33.005
  Bottom Layer w0.2: v1(6.9,28.8) 7.8,29.7 v2(7.8,30.6) v2(7.8,32.5) v2(7.8,34.4) v2(7.8,36.3) ; v1(81.8,47.5) v1(81.8,49.1) v1(81.8,50.7) v1(81.8,52.3)
  Bottom Layer w0.5: v3(37,97.7) v3(38.3,97.7) v4(58.5,97.7) v4(100.8,97.7) 135.012,97.7 138.745,93.967 138.745,34.067 X3.10@135.348,30.67
  other v3: 37.675,97.691
3V3_PER: F3.1 X1.13 X1.14 | length 35
  Top Layer w0.5: X1.13@-12.44,66.391 v3(-9.306,66.391) v3(-8.006,66.391) v3(-7.306,66.391) v3(-6.606,66.391) v3(-5.806,66.391) 2.031,66.391 11.31,75.67 F3.1@11.31,76.4
  Bottom Layer w0.5: X1.14@-12.44,66.391 v3(-9.306,66.391) v3(-8.006,66.391) v3(-7.306,66.391) v3(-6.606,66.391) v3(-5.806,66.391)
  other v3: -8.63,66.382
5V: C11.1 F2.2 S1.3 U7.5 X3.20 | length 253.8
  Top Layer w0.2: 28.4,81.4 28.5,81.5 v1(30,81.5) ; v1(34,81.5) 34.015,81.515 37.785,81.515 C11.1@37.8,81.53 39.28,81.53 U7.5@39.3,81.55
  Top Layer w0.4: S1.3@63.5,88.6 v4(63.5,98.8)
  Top Layer w0.5: F2.2@16.09,80.7 27.7,80.7 28.4,81.4 ; 28.5,81.5 33,86 33,97.5 v3(34.3,98.8) v3(35.6,98.8)
  Bottom Layer w0.2: v1(30,81.5) v1(34,81.5)
  Bottom Layer w0.5: v3(34.3,98.8) v4(63.5,98.8) 136.2,98.8 140.1,94.9 140.1,10.022 X3.20@135.348,5.27
  other v3: 34.975,98.791
5V_PER: F2.1 X1.9 X1.10 | length 36.1
  Top Layer w0.5: X1.9@-12.44,67.991 v3(-9.306,67.991) v3(-8.006,67.991) v3(-7.306,67.991) v3(-6.606,67.991) v3(-5.806,67.991) -0.669,67.991 11.31,79.97 F2.1@11.31,80.7
  Bottom Layer w0.5: X1.10@-12.44,67.991 v3(-9.306,67.991) v3(-8.006,67.991) v3(-7.306,67.991) v3(-6.606,67.991) v3(-5.806,67.991)
  other v3: -8.63,67.982
AdapterCardOK: R1.2 X1.100 | length 14.1
  Top Layer w0.2: v2(0.6,28.8) R1.2@1.67,28.8
  Bottom Layer w0.2: X1.100@-12.436,28.796 -12.431,28.8 v2(0.6,28.8)
ADDR_0: R5.2 U1.1 X1.79 | length 25.5
  Top Layer w0.15: X1.79@-12.44,36.791 -9.791,36.791 -8.2,35.2 9.147,35.2 9.95,34.397 9.95,34.347 10.808,34.347 11.35,33.805 U1.1@11.775,33.805
ADDR_1: R4.2 U1.2 X1.95 | length 25.1
  Top Layer w0.15: X1.95@-12.44,30.391 -12.331,30.5 6.7,30.5 7.8,31.6 9.103,31.6 9.95,32.447 9.95,32.497 9.988,32.535 U1.2@11.775,32.535
ADDR_2: R3.2 U1.3 X1.80 | length 32.6
  Top Layer w0.15: v2(-9,36.8) -7.8,35.6 11.4,35.6 13.1,33.9 v2(13.2,33.9) ; R3.2@9.95,30.688 9.95,30.738 10.3,31.088 10.35,31.088 10.527,31.265 U1.3@11.775,31.265 11.91,31.4 12.7,31.4 13.2,31.9 v2(13.2,32.8)
  Bottom Layer w0.15: X1.80@-12.44,36.791 -12.431,36.8 v2(-9,36.8) ; v2(13.2,32.8) v2(13.2,33.9)
CarrierReady: R73.1 TP1.1 X1.99 | length 112.6
  Top Layer w0.15: TP1.1@-1.7,28.7 -1.5,28.7 -0.8,28 v4(27,28) ; v4(30.5,28) 48.6,9.9 R73.1@92.27,9.9
  Top Layer w0.2: X1.99@-12.44,28.791 TP1.1@-1.6,28.8
  Bottom Layer w0.15: v4(27,28) v4(30.5,28)
CPLD_DigIn_01: X1.83
CPLD_DigIn_02: X1.85
CPLD_DigOut_01: X1.84
CPLD_DigOut_02: X1.86
DIG_IO_00: R43.1 U2.3 X1.17 | length 122.4
  Top Layer w0.15: X1.17@-12.44,64.791 -7.473,64.791 -6.864,65.4 59.9,65.4 82,87.5 R43.1@92.27,87.5 ; R43.1@92.3,87.5 R43.1@92.27,87.5 ; U2.3@99.1,84.275 97.125,84.275 94.7,86.7 92.87,86.7 92.27,87.3 R43.1@92.27,87.5
DIG_IO_01: R44.1 U2.4 X1.18 | length 121.4
  Top Layer w0.15: v2(-6.606,64.791) -6.597,64.8 60.149,64.8 81.249,85.9 R44.1@92.27,85.9 ; R44.1@92.3,85.9 R44.1@92.27,85.9 ; U2.4@99.1,83.625 96.175,83.625 94.7,85.1 92.87,85.1 92.27,85.7 R44.1@92.27,85.9
  Bottom Layer w0.15: X1.18@-12.44,64.791 v2(-6.606,64.791)
DIG_IO_02: R45.1 U2.5 X1.21 | length 121
  Top Layer w0.15: X1.21@-12.44,63.191 -7.473,63.191 -6.864,63.8 60.563,63.8 81.063,84.3 R45.1@92.27,84.3 ; R45.1@92.3,84.3 R45.1@92.27,84.3 ; U2.5@99.1,82.975 95.225,82.975 94.7,83.5 92.87,83.5 92.27,84.1 R45.1@92.27,84.3
DIG_IO_03: R46.1 U2.6 X1.22 | length 120.3
  Top Layer w0.15: v2(-6.606,63.191) -6.597,63.2 60.811,63.2 80.311,82.7 R46.1@92.27,82.7 ; R46.1@92.3,82.7 R46.1@92.27,82.7 ; U2.6@99.1,82.325 95.125,82.325 94.7,81.9 92.87,81.9 92.27,82.5 R46.1@92.27,82.7
  Bottom Layer w0.15: X1.22@-12.44,63.191 v2(-6.606,63.191)
DIG_IO_04: R47.1 U2.7 X1.25 | length 120.6
  Top Layer w0.15: X1.25@-12.44,61.591 -7.473,61.591 -6.864,62.2 61.225,62.2 80.125,81.1 R47.1@92.2,81.1 ; R47.1@92.27,81.1 92.27,80.9 92.87,80.3 94.7,80.3 96.075,81.675 U2.7@99.1,81.675
DIG_IO_05: R48.1 U2.8 X1.26 | length 120.4
  Top Layer w0.15: v2(-6.606,61.591) -6.597,61.6 61.474,61.6 79.374,79.5 R48.1@92.27,79.5 ; R48.1@92.3,79.5 R48.1@92.27,79.5 ; U2.8@99.1,81.025 97.025,81.025 94.7,78.7 92.87,78.7 92.27,79.3 R48.1@92.27,79.5
  Bottom Layer w0.15: X1.26@-12.44,61.591 v2(-6.606,61.591)
DIG_IO_06: R49.1 U2.9 X1.29 | length 120.8
  Top Layer w0.15: X1.29@-12.44,59.991 -7.473,59.991 -6.864,60.6 61.888,60.6 79.188,77.9 R49.1@92.27,77.9 ; R49.1@92.3,77.9 R49.1@92.27,77.9 ; U2.9@99.1,80.375 97.975,80.375 94.7,77.1 92.87,77.1 92.27,77.7 R49.1@92.27,77.9
DIG_IO_07: R50.1 U2.10 X1.30 | length 120.9
  Top Layer w0.15: v2(-6.606,59.991) -6.597,60 62.137,60 78.437,76.3 R50.1@92.27,76.3 ; R50.1@92.3,76.3 R50.1@92.27,76.3 ; U2.10@99.1,79.725 99.088,79.713 98.213,79.713 95.3,76.8 95.3,76.1 94.7,75.5 92.87,75.5 92.27,76.1 R50.1@92.27,76.3
  Bottom Layer w0.15: X1.30@-12.44,59.991 v2(-6.606,59.991)
DIG_IO_08: R51.1 U4.3 X1.33 | length 116.1
  Top Layer w0.15: X1.33@-12.44,58.391 -7.473,58.391 -6.864,59 85.7,59 R51.1@92.27,65.57 ; R51.1@92.27,65.6 R51.1@92.27,65.57 ; R51.1@92.3,65.6 R51.1@92.27,65.57 ; U4.3@99.1,62.275 97.225,62.275 94.7,64.8 92.87,64.8 92.27,65.4 R51.1@92.27,65.57
DIG_IO_09: R52.1 U4.4 X1.34 | length 115
  Top Layer w0.15: v2(-6.606,58.391) -6.597,58.4 86.7,58.4 R52.1@92.27,63.97 ; R52.1@92.27,64 R52.1@92.27,63.97 ; R52.1@92.3,64 R52.1@92.27,63.97 ; U4.4@99.1,61.625 96.275,61.625 94.7,63.2 92.87,63.2 92.27,63.8 R52.1@92.27,63.97
  Bottom Layer w0.15: X1.34@-12.44,58.391 v2(-6.606,58.391)
DIG_IO_10: R53.1 U4.5 X1.37 | length 114.6
  Top Layer w0.15: X1.37@-12.44,56.791 -7.473,56.791 -6.864,57.4 87.3,57.4 R53.1@92.27,62.37 ; R53.1@92.27,62.4 R53.1@92.27,62.37 ; R53.1@92.3,62.4 R53.1@92.27,62.37 ; U4.5@99.1,60.975 95.325,60.975 94.7,61.6 92.87,61.6 92.27,62.2 R53.1@92.27,62.37